# Altium PCB Tigershark 3D R1.7.PcbDoc (part 2 of 4)
Units mil, origin at the board's own origin, x right, y up, seen from the top; angles counter-clockwise.
Board outline 5500 x 4600 mil, 4 copper layers (Top Layer, Groun Plane, Power Plane, Bottom Layer); 303 components, 232 nets, 993 pads, 850 vias.
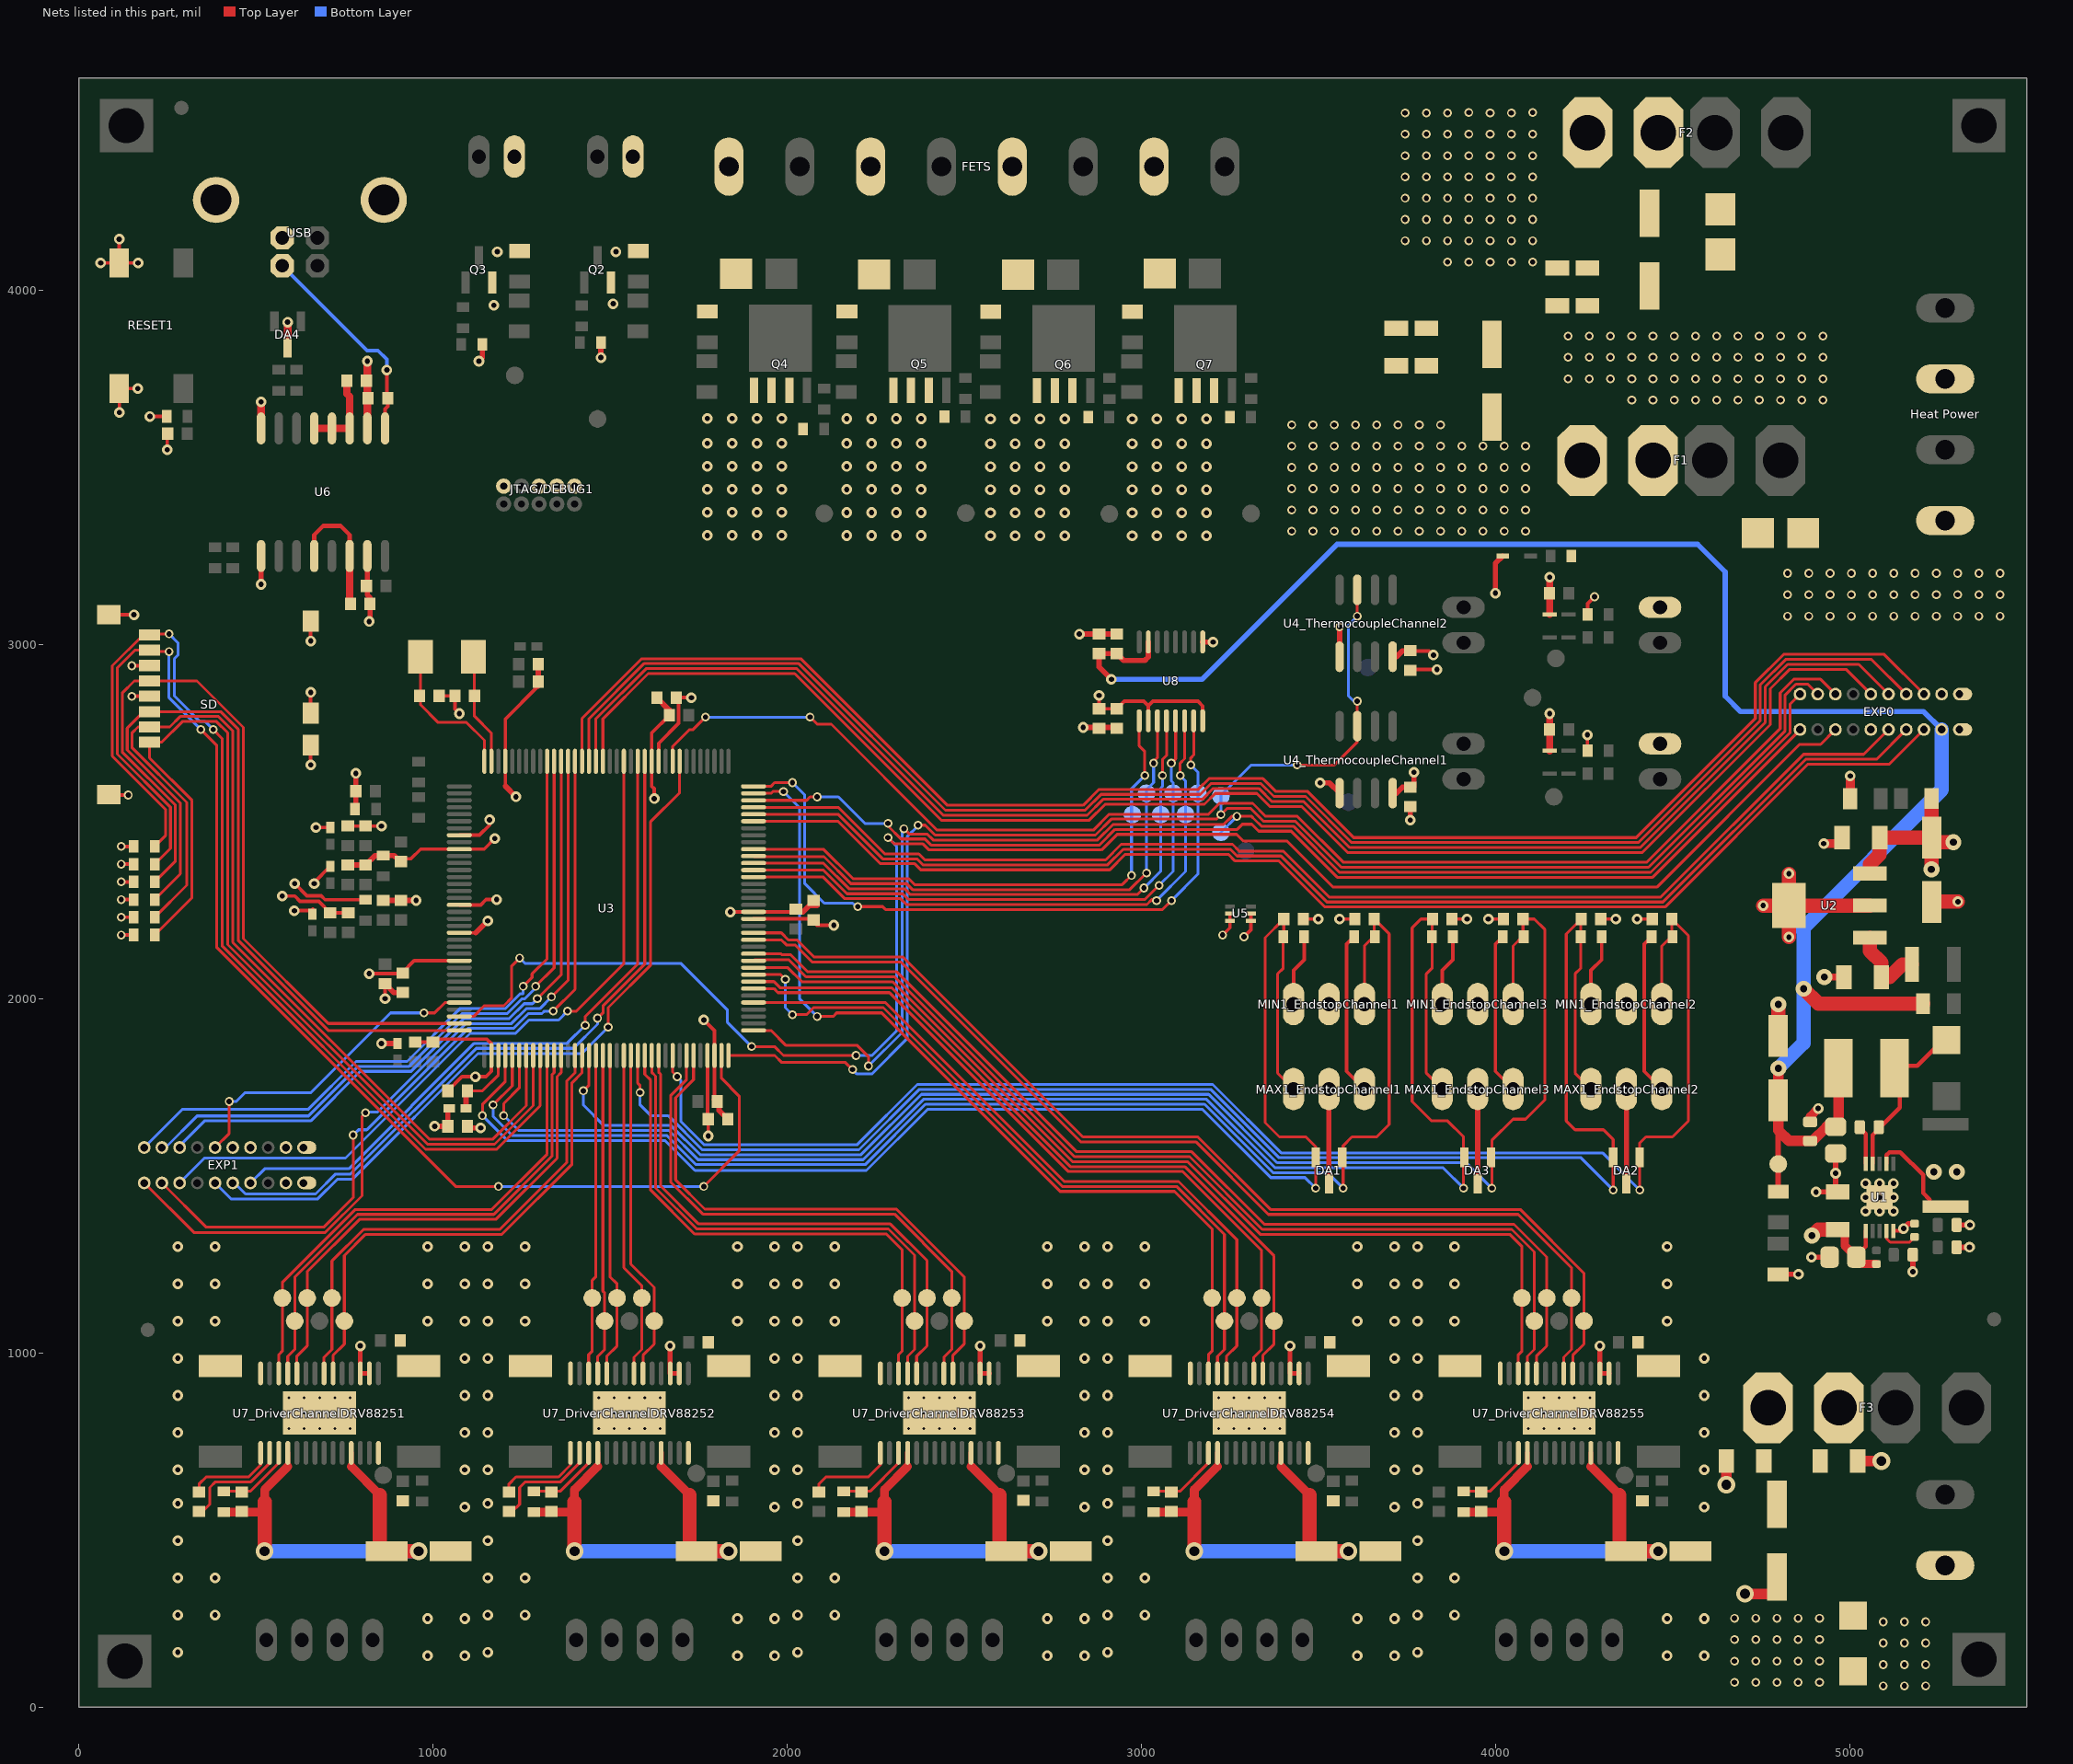
[diagram p4: the nets of this part, all layers, seen from the top]

## Via types
v1: diameter 30, hole 15, Top Layer to Bottom Layer, tented both sides, 375 vias
v2: diameter 25, hole 15, Top Layer to Bottom Layer, tented both sides, 369 vias
v3: diameter 19.68, hole 7.87, Top Layer to Bottom Layer, tented both sides, 75 vias
v4: diameter 50, hole 28, Top Layer to Bottom Layer, tented both sides, 13 vias
v5: diameter 45, hole 20, Top Layer to Bottom Layer, tented both sides, 9 vias
v6: diameter 30, hole 15, Top Layer to Bottom Layer, 9 vias

## Nets (pads, with @x,y where several pads share a name; then routed paths per layer and width w, separated by ;. In a path a pad name is that pad's centre, name@x,y a point inside that pad or via, vN(x,y) a via of type N, cw(c..) or ccw(c..) an arc to the next point about the centre after c; other vN are vias at no path point)
3.3VCC: C7.2 C25.2 C26.1 C29.1 C31_ThermocoupleChannel1.2 C31_ThermocoupleChannel2.2 C45.2 C46.2 C47.2 C48.2 C64.2 EXP0.12 EXP1.9 EXP1.12 FB5.1 FB6.1 FB7.1 FB8.1 FB9.1 JTAG/DEBUG1.1@1400,3447 MAX1_EndstopChannel1.3 MAX1_EndstopChannel2.3 MAX1_EndstopChannel3.3 MIN1_EndstopChannel1.3 MIN1_EndstopChannel2.3 MIN1_EndstopChannel3.3 R2_EndstopChannel1.1 R2_EndstopChannel2.1 R2_EndstopChannel3.1 R3_EndstopChannel1.1 R3_EndstopChannel2.1 R3_EndstopChannel3.1 R6.1 R11.2 R19_ThermistorChannel1.2 R19_ThermistorChannel2.2 R21.2 R24.2 R26.2 R27.2 R28.2 R29.2 R34.2 SD.4 U2.3 U3.11 U3.62 U3.105 U3.125 U4_ThermocoupleChannel1.4 U4_ThermocoupleChannel2.4 U5.1 U5.2 U5.5 U5.6 U7_DriverChannelDRV88251.16 U7_DriverChannelDRV88251.17 U7_DriverChannelDRV88252.16 U7_DriverChannelDRV88252.17 U7_DriverChannelDRV88253.16 U7_DriverChannelDRV88253.17 U7_DriverChannelDRV88254.16 U7_DriverChannelDRV88254.17 U7_DriverChannelDRV88255.16 U7_DriverChannelDRV88255.17 U8.2 U8.8 | length 5691.2
  Top Layer w10: v2(120,2180) R34.2@155.47,2180 ; v2(120,2230) R29.2@155.47,2230 ; v2(120,2280) R28.2@155.47,2280 ; v2(120,2330) R27.2@155.47,2330 ; v2(120,2380) R26.2@155.47,2380 ; v2(120,2430) R24.2@155.47,2430 ; v2(150,2853.94) SD.4@200,2853.94 ; v1(201,3644) R21.2@248.47,3644 ; v1(609,2248.62) 661.22,2248.62 FB5.1@661.22,2252.8 ; v1(610,2325) 644,2291 684.19,2291 695.66,2279.53 R6.1@810,2279.53 ; v1(665,2325) 665,2328.62 FB7.1@710,2373.62 ; v1(670,2483.62) FB8.1@710,2483.62 ; v1(820,2070.81) 895,2070.81 ; C48.2@915,2072.56 915,2075 947.36,2107.36 U3.62@1074.65,2107.36 ; U3.11@1637.64,2670.35 1637.64,2721.18 1694.19,2777.73 1694.19,2843.37 C47.2@1687.56,2850 v1(1730,2850) ; C45.2@1775.43,1660 U3.105@1775.43,1839.65 ; v1(1777.44,1612.56) C45.2@1777.44,1660 ; U3.125@1905.35,2225.47 2071.97,2225.47 C46.2@2075,2222.44 ; C46.2@2083.25,2209.19 2085,2207.44 v1(2132.44,2207.44) ; v1(2881,2856) C25.2@2881,2818.56 C26.1@2931,2818.56 2952.44,2840 3007,2840 3020.02,2826.98 ; U8.2@3020.02,2784.78 3020.02,2826.98 ; U8.8@3173.57,2784.78 3173.57,2826.43 3160,2840 3033.05,2840 3020.02,2826.98 ; v2(3230,2180) 3250.47,2200.47 U5.6@3250.47,2220.32 U5.5@3250.47,2240 ; v2(3290,2175) 3309.53,2194.53 U5.1@3309.53,2220.32 U5.2@3309.53,2240 ; MIN1_EndstopChannel1.3@3430,1985 3430,2080 3460,2110 R3_EndstopChannel1.1@3460,2175 ; R2_EndstopChannel1.1@3600.95,2175 3580,2154.06 3580,1795 MAX1_EndstopChannel1.3@3630,1745 ; C31_ThermocoupleChannel2.2@3775,2982.05 3812.95,2982.05 v1(3825,2970) ; MIN1_EndstopChannel3.3@3850,1985 3850,2080 3880,2110 R3_EndstopChannel3.1@3880,2175 ; R2_EndstopChannel3.1@4020.95,2175 4000,2154.06 4000,1795 MAX1_EndstopChannel3.3@4050,1745 ; v1(4260,2745) 4260,2700.47 R19_ThermistorChannel1.2@4260.47,2700 ; R19_ThermistorChannel2.2@4260.47,3085 4260.47,3115.47 v2(4280,3135) ; MIN1_EndstopChannel2.3@4270,1985 4270,2080 4300,2110 R3_EndstopChannel2.1@4300,2175 ; R2_EndstopChannel2.1@4440.95,2175 4420,2154.06 4420,1795 MAX1_EndstopChannel2.3@4470,1745
  Top Layer w14: U7_DriverChannelDRV88251.17@795,942.36 v1(795,1020) ; U7_DriverChannelDRV88251.17@795.16,942.2 U7_DriverChannelDRV88251.16@820.75,942.2 ; U7_DriverChannelDRV88252.17@1670,942.36 v1(1670,1020) ; U7_DriverChannelDRV88252.17@1670.16,942.2 U7_DriverChannelDRV88252.16@1695.75,942.2 ; U7_DriverChannelDRV88253.17@2545,942.36 v1(2545,1020) ; U7_DriverChannelDRV88253.17@2545.16,942.2 U7_DriverChannelDRV88253.16@2570.75,942.2 ; U7_DriverChannelDRV88254.17@3420,942.36 v1(3420,1020) ; U7_DriverChannelDRV88254.17@3420.16,942.2 U7_DriverChannelDRV88254.16@3445.75,942.2 ; U7_DriverChannelDRV88255.17@4295,942.36 v1(4295,1020) ; U7_DriverChannelDRV88255.17@4295.16,942.2 U7_DriverChannelDRV88255.16@4320.75,942.2
  Top Layer w15: v1(855,1873.62) FB6.1@900,1873.62 ; v1(1005,1640) C64.2@1042.44,1640 FB9.1@1042.44,1686.06 ; U4_ThermocoupleChannel1.4@3710,2580.51 3721.02,2580.51 3737.56,2597.05 3770,2597.05 v1(3770,2639.49) ; U4_ThermocoupleChannel2.4@3710,2965.51 3721.02,2965.51 3737.56,2982.05 C31_ThermocoupleChannel2.2@3770,2982.05
  Top Layer w40: U2.3@5057.17,2353.55 5057.17,2379.17 5085.15,2407.15 C7.2@5085.15,2455 5231.55,2455 5231.55,2564.76 R11.2@5231.31,2565 ; v5(5231,2365) C29.1@5231,2453.55 ; C29.1@5244.55,2442 v5(5293,2442)
+5VCC: C11.1 C17.1 C20.1 C21.1 C24.1 EXP0.9 L1.2 R7.2 R8.2 R10.1 R25.1 TP1.TP U8.15 | length 5490.3
  Top Layer w15: v1(2916,2902) 2881,2937 C20.1@2881,2974.44 C17.1@2931,2974.44 2950.44,2955 3010,2955 3020.02,2965.02 U8.15@3020.02,3007.22 ; R8.2@4798.57,1455.62 TP1.TP@4798.57,1533.31 4798.57,1628.31 ; R7.2@5178.35,1277.32 5178.57,1277.09 v1(5178.57,1229.31) ; R10.1@5302.34,1361.31 v1(5339.57,1361.31)
  Top Layer w30: v5(4798.57,1803.31) C24.1@4798.57,1713.76 4798.57,1628.31 4828.35,1598.54 C11.1@4888.57,1598.54 4895.57,1598.54 4935.74,1638.72 C21.1@4960.57,1638.72 ; C21.1@4968.83,1646.98 L1.2@4968.83,1804.31
  Top Layer w40: v5(4870,2028) 4912,1986 R25.1@5207.69,1986
  Bottom Layer w15: v1(2916,2902) 3172,2902 3553,3283 4571,3283 4649,3205 4649,2854 4692,2811 5209,2811 EXP0.9@5260,2760
  Bottom Layer w40: v5(4798.57,1803.31) 4870,1874.74 4870,2190.98 4868,2192.98 4868,2198 5260,2590 EXP0.9@5260,2760
+12VCC1: C9.1 C10.1 C16.1 C18.2 C19.2 C66_DriverChannelDRV88251.1 C66_DriverChannelDRV88252.1 C66_DriverChannelDRV88253.1 C66_DriverChannelDRV88254.1 C66_DriverChannelDRV88255.1 C69_DriverChannelDRV88251.1 C69_DriverChannelDRV88252.1 C69_DriverChannelDRV88253.1 C69_DriverChannelDRV88254.1 C69_DriverChannelDRV88255.1 D8.C F3.2 R17.2 R30_DriverChannelDRV88251.1 R30_DriverChannelDRV88252.1 R30_DriverChannelDRV88253.1 R30_DriverChannelDRV88254.1 R30_DriverChannelDRV88255.1 U1.1 U7_DriverChannelDRV88251.4 U7_DriverChannelDRV88251.11 U7_DriverChannelDRV88252.4 U7_DriverChannelDRV88252.11 U7_DriverChannelDRV88253.4 U7_DriverChannelDRV88253.11 U7_DriverChannelDRV88254.4 U7_DriverChannelDRV88254.11 U7_DriverChannelDRV88255.4 U7_DriverChannelDRV88255.11 | length 6500.5
  Top Layer w12: C10.1@5036.05,1291.68 5045.2,1300.83 U1.1@5045.2,1344.83
  Top Layer w14: 590.43,679.43 U7_DriverChannelDRV88251.4@590.43,717.8 ; 769.57,679.43 U7_DriverChannelDRV88251.11@769.57,717.8 ; 1465.43,679.43 U7_DriverChannelDRV88252.4@1465.43,717.8 ; 1644.57,679.43 U7_DriverChannelDRV88252.11@1644.57,717.8 ; 2340.43,679.43 U7_DriverChannelDRV88253.4@2340.43,717.8 ; 2519.57,679.43 U7_DriverChannelDRV88253.11@2519.57,717.8 ; 3215.43,679.43 U7_DriverChannelDRV88254.4@3215.43,717.8 ; 3394.57,679.43 U7_DriverChannelDRV88254.11@3394.57,717.8 ; 4090.43,679.43 U7_DriverChannelDRV88255.4@4090.43,717.8 ; 4269.57,679.43 U7_DriverChannelDRV88255.11@4269.57,717.8
  Top Layer w24: C9.1@4986.57,1328.15 4986.57,1302.72 C10.1@5018.98,1270.31 ; C10.1@5037.98,1251.31 R17.2@5075.57,1251.31
  Top Layer w25: R30_DriverChannelDRV88251.1@410,550.47 525,550.47 ; 525,580 525,614 590.43,679.43 ; 769.57,679.43 850,599 ; R30_DriverChannelDRV88252.1@1285,550.47 1400,550.47 ; 1400,580 1400,614 1465.43,679.43 ; 1644.57,679.43 1725,599 ; R30_DriverChannelDRV88253.1@2160,550.47 2275,550.47 ; 2275,580 2275,614 2340.43,679.43 ; 2519.57,679.43 2600,599 ; R30_DriverChannelDRV88254.1@3035,550.47 3150,550.47 ; 3150,580 3150,614 3215.43,679.43 ; 3394.57,679.43 3475,599 ; R30_DriverChannelDRV88255.1@3910,550.47 4025,550.47 ; 4025,580 4025,614 4090.43,679.43 ; 4269.57,679.43 4350,599
  Top Layer w40: v4(525,440) 525,580 ; C69_DriverChannelDRV88251.1@850,440.55 850,599 ; C69_DriverChannelDRV88251.1@869.45,440 v4(960,440) ; v4(1400,440) 1400,580 ; C69_DriverChannelDRV88252.1@1725,440.55 1725,599 ; C69_DriverChannelDRV88252.1@1744.45,440 v4(1835,440) ; v4(2275,440) 2275,580 ; C69_DriverChannelDRV88253.1@2600,440.55 2600,599 ; C69_DriverChannelDRV88253.1@2619.45,440 v4(2710,440) ; v4(3150,440) 3150,580 ; C69_DriverChannelDRV88254.1@3475,440.55 3475,599 ; C69_DriverChannelDRV88254.1@3494.45,440 v4(3585,440) ; v4(4025,440) 4025,580 ; C69_DriverChannelDRV88255.1@4350,440.55 4350,599 ; C69_DriverChannelDRV88255.1@4369.45,440 v4(4460,440) ; v5(4894,1331) 4911.17,1348.17 C9.1@4966.57,1348.17
  Bottom Layer w40: v4@530,440 v4(960,440) ; v4@1405,440 v4(1835,440) ; v4@2280,440 v4(2710,440) ; v4@3155,440 v4(3585,440) ; v4@4030,440 v4(4460,440)
  other v2: 4675,70 4735,70 4795,70 4855,70 4915,70 4675,130 4735,130 4795,130 4855,130 4915,130 4675,191 4735,191 4795,191 4855,191 4915,191 4675,251 4735,251 4795,251 4855,251 4915,251
+12VCC2: C12.1 C14.2 C15.2 D6.2 D12.2 D15.2 D17.2 F1.2 FAN-1.1 FAN-2.1 FETS.1 FETS.3 FETS.5 R1.2 R13.1 R47.1 R56.2 R60.2 R64.2
  other v2: 3425,3320 3485,3320 3545,3320 3605,3320 3665,3320 3725,3320 3785,3320 3845,3320 3905,3320 3965,3320 4025,3320 4085,3320 3425,3380 3485,3380 3545,3380 3605,3380 3665,3380 3725,3380 3785,3380 3845,3380 3905,3380 3965,3380 4025,3380 4085,3380 3425,3440 3485,3440 3545,3440 3605,3440 3665,3440 3725,3440 3785,3440 3845,3440 3905,3440 3965,3440 4025,3440 4085,3440 3425,3500 3485,3500 3545,3500 3605,3500 3665,3500 3725,3500 3785,3500 3845,3500 3905,3500 3965,3500 4025,3500 4085,3500 3425,3560 3485,3560 3545,3560 3605,3560 3665,3560 3725,3560 3785,3560 3845,3560 3905,3560 3965,3560 4025,3560 4085,3560 3425,3620 3485,3620 3545,3620 3605,3620 3665,3620 3725,3620 3785,3620 3845,3620
+12VCC3: C3.1 C5.2 C6.2 D4.2 D19.2 F2.2 FETS.7 R68.2
  other v2: 3865,4080 3925,4080 3985,4080 4045,4080 4105,4080 3745,4140 3805,4140 3865,4140 3925,4140 3985,4140 4045,4140 4105,4140 3745,4200 3805,4200 3865,4200 3925,4200 3985,4200 4045,4200 4105,4200 3745,4260 3805,4260 3865,4260 3925,4260 3985,4260 4045,4260 4105,4260 3745,4320 3805,4320 3865,4320 3925,4320 3985,4320 4045,4320 4105,4320 3745,4380 3805,4380 3865,4380 3925,4380 3985,4380 4045,4380 4105,4380 3745,4441 3805,4441 3865,4441 3925,4441 3985,4441 4045,4441 4105,4441 3745,4501 3805,4501 3865,4501 3985,4501 4045,4501 3925,4502 4105,4502
AVREF: C65.2 FB9.2 U3.75 | length 206.7
  Top Layer w8: C65.2@1097.56,1740 1140,1740 1184.88,1784.88 U3.75@1184.88,1839.65
  Top Layer w15: FB9.2@1093.62,1690 C65.2@1093.62,1736.06
BED_PWM: TP38.1 U3.144 U8.7 | length 2039.8
  Top Layer w8: U3.144@1905.35,2599.49 1954.49,2599.49 1965,2610 v2(2015,2610) ; v2(2200,2260) 2270,2260 2278,2252 3060.14,2252 v2@3087.78,2279.64 ; v2(3140,2660) 3140,2680 3148.39,2688.39 U8.7@3148.39,2784.78
  Bottom Layer w8: v2(2015,2610) 2050,2575 2050,2325 2105,2270 2185,2270 2195,2260 v2(2200,2260) ; v2@3087.78,2279.64 3160,2351.86 3160,2640 v2(3140,2660)
  other v2: 3085.71,2277.22
DIR1: TP39_DriverChannelDRV88251.1 U3.87 U7_DriverChannelDRV88251.20 | length 1414
  Top Layer w8: U7_DriverChannelDRV88251.20@718.39,942.2 718.39,993.39 750,1025 TP39_DriverChannelDRV88251.1@750,1090 750,1274.8 810.2,1335 1195.2,1335 1392.68,1532.48 1392.68,1762.68 1421.1,1791.1 U3.87@1421.1,1839.65
DIR2: TP39_DriverChannelDRV88252.1 U3.94 U7_DriverChannelDRV88252.20 | length 937.9
  Top Layer w8: U3.94@1558.9,1839.65 1558.9,1251.1 1625,1185 TP39_DriverChannelDRV88252.1@1625,1090 1625,1025 1593.39,993.39 U7_DriverChannelDRV88252.20@1593.39,942.2
DIR3: TP39_DriverChannelDRV88253.1 U3.103 U7_DriverChannelDRV88253.20 | length 1586
  Top Layer w8: U3.103@1736.06,1839.65 1736.06,1771.26 1685.32,1720.52 1685.32,1488.67 1767.99,1406 2309.2,1406 2500,1215.2 TP39_DriverChannelDRV88253.1@2500,1090 2500,1025 2468.39,993.39 U7_DriverChannelDRV88253.20@2468.39,942.2
DIR4: TP39_DriverChannelDRV88254.1 U3.116 U7_DriverChannelDRV88254.20 | length 2135.3
  Top Layer w8: U3.116@1905.35,2048.31 1963.1,2048.31 1980.16,2031.25 2294.95,2031.25 2800.21,1526 3122.99,1526 3375,1273.99 TP39_DriverChannelDRV88254.1@3375,1090 3375,1025 3343.39,993.39 U7_DriverChannelDRV88254.20@3343.39,942.2
DIR5: TP39_DriverChannelDRV88255.1 U3.123 U7_DriverChannelDRV88255.20 | length 3038.8
  Top Layer w8: U3.123@1905.35,2186.1 1983.7,2186.1 2003.8,2166 2028.2,2166 2076.31,2117.88 2327.12,2117.88 2835,1610 3160,1610 3365,1405 4070.2,1405 4250,1225.2 TP39_DriverChannelDRV88255.1@4250,1090 4250,1025 4218.39,993.39 U7_DriverChannelDRV88255.20@4218.39,942.2
DIR_EXP1: EXP1.6 U3.13 | length 2026.6
  Top Layer w8: v2(1465,1945) 1481,1961 1481,1980.8 1598.27,2098.07 U3.13@1598.27,2670.35
  Bottom Layer w8: EXP1.6@445,1475 471,1449 669,1449 725,1505 767.6,1505 1122.6,1860 1396.82,1860 1465,1928.18 v2(1465,1945)
DIR_EXP2: EXP1.15
DRV_RESET_EXP1: EXP1.7 U3.14 | length 1936.2
  Top Layer w8: v2(1430,1925) 1430,1949.6 1578.58,2098.18 U3.14@1578.58,2670.35
  Bottom Layer w8: EXP1.7@485,1480 525,1520 762.8,1520 1116.8,1874 1379,1874 v2(1430,1925)
DRV_RESET_EXP2: EXP1.14
EN1: TP32_DriverChannelDRV88251.1 U3.86 U7_DriverChannelDRV88251.21 | length 1416.5
  Top Layer w8: U7_DriverChannelDRV88251.21@692.8,942.2 692.8,987.8 715,1010 TP32_DriverChannelDRV88251.1@715,1155 715,1259.6 804.4,1349 1189.4,1349 1378.68,1538.28 1378.68,1768.48 1401.42,1791.22 U3.86@1401.42,1839.65
EN2: TP32_DriverChannelDRV88252.1 U3.93 U7_DriverChannelDRV88252.21 | length 927.7
  Top Layer w8: U3.93@1539.21,1839.65 1539.21,1240.79 1590,1190 TP32_DriverChannelDRV88252.1@1590,1155 1590,1010 1567.8,987.8 U7_DriverChannelDRV88252.21@1567.8,942.2
EN3: TP32_DriverChannelDRV88253.1 U3.102 U7_DriverChannelDRV88253.21 | length 1571.1
  Top Layer w8: U3.102@1716.38,1839.65 1716.38,1771.38 1671.32,1726.32 1671.32,1482.87 1762.2,1392 2303.4,1392 2465,1230.4 TP32_DriverChannelDRV88253.1@2465,1155 2465,1010 2442.8,987.8 U7_DriverChannelDRV88253.21@2442.8,942.2
EN4: TP32_DriverChannelDRV88254.1 U3.115 U7_DriverChannelDRV88254.21 | length 2097.1
  Top Layer w8: U3.115@1905.35,2028.62 1962.99,2028.62 1974.36,2017.25 2289.16,2017.25 2794.41,1512 3117.2,1512 3340,1289.2 TP32_DriverChannelDRV88254.1@3340,1155 3340,1010 3317.8,987.8 U7_DriverChannelDRV88254.21@3317.8,942.2
EN5: TP32_DriverChannelDRV88255.1 U3.122 U7_DriverChannelDRV88255.21 | length 3000.6
  Top Layer w8: U3.122@1905.35,2166.42 1983.58,2166.42 1998,2152 2022.4,2152 2070.51,2103.88 2321.32,2103.88 2829.2,1596 3154.2,1596 3359.2,1391 4064.4,1391 4215,1240.4 TP32_DriverChannelDRV88255.1@4215,1155 4215,1010 4192.8,987.8 U7_DriverChannelDRV88255.21@4192.8,942.2
EN_EXP1: EXP1.5 U3.8 | length 2163.4
  Top Layer w8: v2(1495,1920) 1495,1975 1615,2095 1615,2500 1696.69,2581.69 U3.8@1696.69,2670.35
  Bottom Layer w8: EXP1.5@385,1480 430,1435 675,1435 730,1490 772.4,1490 1127.4,1845 1420,1845 v2(1495,1920)
EN_EXP2: EXP1.16 U3.68 | length 911.9
  Top Layer w8: EXP1.16@385,1580 425,1620 v2(425,1710) ; v2(975,1960) 1005,1960 1034.25,1989.25 U3.68@1074.65,1989.25
  Bottom Layer w8: v2(425,1710) 445,1710 470,1735 655.8,1735 880.8,1960 v2(975,1960)
EXP_CS: EXP0.1 U3.142 | length 3278.5
  Top Layer w8: U3.142@1905.35,2560.12 2055.12,2560.12 2065,2570 v2(2085,2570) ; v2(2285,2495) 2285,2488.18 2322.18,2451 2389.6,2451 2406.6,2434 2882.19,2434 2926.12,2477.93 3271.11,2477.93 3285.68,2492.5 3312.3,2492.5 3331.8,2473 3423.61,2473 3553.61,2343 4444.01,2343 4860,2758.99 EXP0.1@4860,2760
  Bottom Layer w8: v2(2085,2570) 2145,2570 2220,2495 v2(2285,2495)
EXP_INTERRUP1: EXP0.16 U3.19 | length 4326.6
  Top Layer w8: U3.19@1480.16,2670.35 1480.16,2790.16 1608,2918 2021.6,2918 2435.6,2504 2853.2,2504 2898.2,2549 3178.4,2549 3208.9,2579.5 3326.31,2579.5 3362.81,2543 3452.6,2543 3582.6,2413 4415.01,2413 4776,2773.99 4776,2874.99 4831.01,2930 4990,2930 EXP0.16@5060,2860
EXP_INTERRUP2: EXP0.15 U3.20 | length 4408.1
  Top Layer w8: U3.20@1460.47,2670.35 1460.47,2790.47 1602,2932 2027.4,2932 2441.4,2518 2847.4,2518 2892.4,2563 3172.6,2563 3203.1,2593.5 3332.11,2593.5 3368.61,2557 3458.4,2557 3588.4,2427 4409.21,2427 4762,2779.79 4762,2880.79 4825.21,2944 5026,2944 EXP0.15@5110,2860
EXP_SYNC: EXP0.6 U3.141 | length 3541.9
  Top Layer w8: U3.141@1905.35,2540.43 2144.57,2540.43 2276,2409 2372.21,2409 2389.21,2392 2899.59,2392 2943.51,2435.93 3257.66,2435.93 3276.58,2417 3400.41,2417 3530.41,2287 4467.2,2287 4870.2,2690 5040,2690 EXP0.6@5110,2760
FET_PWM1: TP43.1 U3.135 U8.1 | length 1581.4
  Top Layer w8: U3.135@1905.35,2422.32 2102.68,2422.32 2186,2339 2343.21,2339 2360.21,2322 2946.29,2322 v2@2974.64,2350.36 ; U8.1@2994.43,2784.78 2994.43,2713.57 3010,2698 v2(3010,2630)
  Bottom Layer w8: v2(2972.57,2347.93) 2972.57,2592.57 v2(3010,2630)
FET_PWM2: TP44.1 U3.134 U8.3 | length 1610.8
  Top Layer w8: U3.134@1905.35,2402.64 1906.99,2401 2104.2,2401 2180.2,2325 2337.41,2325 2354.41,2308 2967.64,2308 v2@3014.82,2355.18 ; v2(3035,2665) 3035,2669.8 3046.02,2680.82 U8.3@3046.02,2784.78
  Bottom Layer w8: v2(3015,2355) TP44.1@3015,2580 3015,2590 3035,2610 v2(3035,2665)
FET_PWM3: TP45.1 U3.133 U8.4 | length 1645.5
  Top Layer w8: U3.133@1905.35,2382.95 2102.45,2382.95 2174.9,2310.5 2332.11,2310.5 2348.61,2294 2989,2294 v2@3010,2315 ; v2(3060,2630) 3060,2675 3071.61,2686.61 U8.4@3071.61,2784.78
  Bottom Layer w8: v2@3010,2315 3055,2360 3055,2594.5 3060,2599.5 v2(3060,2630)
  other v2: 3007.93,2312.57
FET_PWM4: TP46.1 U3.132 U8.5 | length 1684.4
  Top Layer w8: U3.132@1905.35,2363.27 2033.27,2363.27 2033.31,2363.31 2102.3,2363.31 2169.1,2296.5 2326.32,2296.5 2342.82,2280 3010.2,2280 3052.27,2322.07 v2@3052.43,2322.07 ; v2(3085,2665) 3097.2,2677.2 U8.5@3097.2,2784.78
  Bottom Layer w8: v2@3052.43,2322.07 3090,2359.64 3090,2610 3085,2615 v2(3085,2665)
  other v2: 3050.36,2319.64
FET_PWM5: TP47.1 U3.131 U8.6 | length 1727.4
  Top Layer w8: U3.131@1905.35,2343.58 2102.22,2343.58 2163.3,2282.5 2320.52,2282.5 2337.02,2266 3016,2266 3029.64,2279.64 v2@3045.36,2279.64 ; v2(3110,2630) 3110,2665 3122.8,2677.8 U8.6@3122.8,2784.78
  Bottom Layer w8: v2@3045.36,2279.64 3125,2359.29 3125,2615 v2(3110,2630)
  other v2: 3043.28,2277.22
GND: "Heat Power.2" "Heat Power.4" "Motor Power.2" C1_EndstopChannel1.2 C1_EndstopChannel2.2 C1_EndstopChannel3.2 C2_EndstopChannel1.2 C2_EndstopChannel2.2 C2_EndstopChannel3.2 C3.2 C4.1 C5.1 C6.1 C7.1 C9.2 C10.2 C11.2 C12.2 C13.1 C14.1 C15.1 C16.2 C17.2 C18.1 C19.1 C20.2 C21.2 C22.2 C23.1 C24.2 C25.1 C26.2 C27.1 C28.1 C29.2 C30_ThermistorChannel1.1 C30_ThermistorChannel2.1 C31_ThermocoupleChannel1.1 C31_ThermocoupleChannel2.1 C32.1 C33.1 C36.1 C37.1 C38.1 C39.1 C41.1 C42.1 C43.1 C44.1 C45.1 C46.1 C47.1 C48.1 C53.1 C54.1 C55.1 C56.1 C57.1 C60.1 C61.1 C63.1 C64.1 C65.1 C69_DriverChannelDRV88251.2 C69_DriverChannelDRV88252.2 C69_DriverChannelDRV88253.2 C69_DriverChannelDRV88254.2 C69_DriverChannelDRV88255.2 C71_DriverChannelDRV88251.1 C71_DriverChannelDRV88252.1 C71_DriverChannelDRV88253.1 C71_DriverChannelDRV88254.1 C71_DriverChannelDRV88255.1 C73.1 C75_DriverChannelDRV88251.1 C75_DriverChannelDRV88252.1 C75_DriverChannelDRV88253.1 C75_DriverChannelDRV88254.1 C75_DriverChannelDRV88255.1 D1.1 D4.1 D5_ThermistorChannel1.1 D5_ThermistorChannel2.1 D6.1 D7.1 D8.A D9.1 DA1.3 DA2.3 DA3.3 EXP0.10 EXP0.11 EXP1.10 EXP1.11 JTAG/DEBUG1.3 JTAG/DEBUG1.5 JTAG/DEBUG1.9 MAX1_EndstopChannel1.2 MAX1_EndstopChannel2.2 MAX1_EndstopChannel3.2 MIN1_EndstopChannel1.2 MIN1_EndstopChannel2.2 MIN1_EndstopChannel3.2 P2_ThermistorChannel1.2 P2_ThermistorChannel2.2 Q2.2 Q3.2 Q4.1 Q4.2 Q4.3 Q5.1 Q5.2 Q5.3 Q6.1 Q6.2 Q6.3 Q7.1 Q7.2 Q7.3 R4.2 R9.1 R12.2 R23.1 R32_DriverChannelDRV88251.1 R32_DriverChannelDRV88252.1 R32_DriverChannelDRV88253.1 R32_DriverChannelDRV88254.1 R32_DriverChannelDRV88255.1 R33_DriverChannelDRV88251.1 R33_DriverChannelDRV88252.1 R33_DriverChannelDRV88253.1 R33_DriverChannelDRV88254.1 R33_DriverChannelDRV88255.1 R46.2 R55.2 R59.2 R63.2 R67.2 R71.2 RESET1.2 SD.6 SD.9 SD.10 SD.11 SD.12 SD.13 U1.5 U1.7 U1.11 U2.2 U2.4 U3.12 U3.33 U3.44 U3.46 U3.54 U3.58 U3.74 U3.106 U3.126 U4_ThermocoupleChannel1.1 U4_ThermocoupleChannel2.1 U6.9 U6.15 U7_DriverChannelDRV88251.14 U7_DriverChannelDRV88251.28 U7_DriverChannelDRV88251.29 U7_DriverChannelDRV88252.14 U7_DriverChannelDRV88252.28 U7_DriverChannelDRV88252.29 U7_DriverChannelDRV88253.14 U7_DriverChannelDRV88253.28 U7_DriverChannelDRV88253.29 U7_DriverChannelDRV88254.14 U7_DriverChannelDRV88254.28 U7_DriverChannelDRV88254.29 U7_DriverChannelDRV88255.14 U7_DriverChannelDRV88255.28 U7_DriverChannelDRV88255.29 U8.9 | length 7891.9
  Top Layer w10: v1(62.17,4077.17) RESET1.2@114.45,4077.17 ; SD.10@85,3084 v1(156,3084) ; SD.9@86,2575 v2(140,2575) ; v1(114.45,4144.45) RESET1.2@114.45,4077.17 ; v1(115,3655) 115,3722.28 RESET1.2@114.45,3722.83 v1(167.17,3722.83) ; v2(150,2940) 199.45,2940 SD.6@200,2940.55 ; v1(167.83,4077.17) RESET1.2@114.45,4077.17 ; v1(250,3550) 250,3593.56 C63.1@251.44,3595 ; v1(575,2290) 610,2290 625,2275 677.56,2275 C55.1@710,2242.56 C54.1@761.22,2242.56 ; v1(655,2660) SD.11@655,2716 ; SD.12@655,2806 v1(655,2865) ; v1(655,3010) SD.13@655,3066 ; C61.1@760,2487.56 C60.1@810,2487.56 v1(855,2487.56) ; v1(865,2000) C42.1@865,2042.44 ; C41.1@900,2395 938.23,2395 965.55,2422.32 U3.46@1074.65,2422.32 1144.84,2422.32 v1(1175,2452.48) ; C27.1@950,1877.56 C13.1@1000,1877.56 1008.52,1886.08 1152.51,1886.08 1165.2,1873.4 U3.74@1165.2,1839.65 1165.2,1795.2 1150,1780 v1(1120,1780) 1082.44,1780 C65.1@1042.44,1740 ; C43.1@1017.56,2855 C44.1@1062.44,2855 1062.44,2817.56 v1(1075,2805) ; U3.58@1074.65,2186.1 1121.1,2186.1 ; U3.54@1074.65,2264.84 1134.84,2264.84 1150,2280 v1(1180,2280) ; U3.44@1074.65,2461.69 1131.69,2461.69 1160,2490 v1(1160,2505) ; 1204.57,2600.16 U3.33@1204.57,2670.35 1204.57,2789.18 1295.39,2880 1297.19,2880 1297.56,2880.37 C33.1@1297.56,2895 ; v1(1625,2565) 1625,2593.11 1617.95,2600.16 U3.12@1617.95,2670.35 1617.95,2750.51 C38.1@1667.44,2800 ; v1(1764.96,1940) 1795.12,1909.84 U3.106@1795.12,1839.65 C23.1@1795.12,1715.13 ; v1@1835.16,2245.16 U3.126@1905.35,2245.16 2045.16,2245.16 ; C2_EndstopChannel1.2@3457.56,2225 v1(3500,2225) ; v1(3560,2225) C1_EndstopChannel1.2@3602.91,2225 ; C31_ThermocoupleChannel2.1@3777.56,2929.49 v1(3835,2929.49) ; C2_EndstopChannel3.2@3877.56,2225 v1(3920,2225) ; v1(3980,2225) C1_EndstopChannel3.2@4022.91,2225 ; C2_EndstopChannel2.2@4297.56,2225 v1(4340,2225) ; v1(4400,2225) C1_EndstopChannel2.2@4442.91,2225 ; U1.5@5123.94,1344.83 v1@5146.09,1344.83
  Top Layer w12: U1.7@5104.26,1533.8 5104.26,1558.49 5112.65,1566.88 5143.13,1566.88 5207.59,1502.42 5207.59,1451.36 5226,1432.95
  Top Layer w15: v1(515,3170) U6.9@515,3249.88 ; C28.1@760,2377.56 C53.1@810,2377.56 836.97,2404.53 R4.2@860,2404.53 890.47,2404.53 C41.1@900,2395 ; R23.1@782.44,2536.97 v1(782.44,2636.22) ; U6.15@815,3249.88 815,3140 822.56,3132.44 C56.1@822.56,3115 v1@822.56,3067.56 ; C37.1@860,2277.56 C36.1@910,2277.56 v1(952.44,2277.56) ; C42.1@865,2042.44 890,2017.44 C48.1@915,2017.44 ; C64.1@1097.56,1640 C64.1@1097.88,1639.68 ; C64.1@1102.56,1635 v1(1135,1635) ; 1121.1,2186.1 v1(1155,2220) ; v1(1130,3800) 1139.53,3809.53 R55.2@1139.53,3847.58 ; 1204.57,2600.16 v1(1234.72,2570) ; C33.1@1297.56,2895 C32.1@1297.56,2945 ; v1(1474.53,3810) R46.2@1474.53,3852.58 ; C47.1@1632.44,2850 1667.44,2815 C38.1@1667.44,2800 ; C23.1@1795.12,1715.13 1808.07,1702.18 1808.07,1684.92 C45.1@1832.99,1660 ; 2045.16,2245.16 2062.56,2262.56 C46.1@2085,2262.56 ; v1(2825.44,3029.56) C20.2@2881,3029.56 C17.2@2931,3029.56 ; v1(2836,2766) C26.2@2928.44,2766 ; U8.9@3173.57,3007.22 3202.78,3007.22 v1(3203,3007) ; v1(3505,2609.49) 3531.02,2609.49 U4_ThermocoupleChannel1.1@3560,2580.51 ; DA1.3@3530,1477.6 MAX1_EndstopChannel1.2@3530,1745 ; U4_ThermocoupleChannel2.1@3560,2965.51 v2(3560,3050) ; v1(3760,2504.49) C31_ThermocoupleChannel1.1@3760,2542.44 ; DA3.3@3950,1477.6 MAX1_EndstopChannel3.2@3950,1745 ; v1(4000,3145) 4000,3229.37 D1.1@4020.63,3250 ; DA2.3@4370,1477.6 MAX1_EndstopChannel2.2@4370,1745 ; D7.1@4798.46,1222.31 v1(4855.57,1222.31) ; v1(4892.57,1270.31) C10.2@4943.57,1270.31 ; v1(4905.57,1454.31) 4905.72,1454.46 C9.2@4966.57,1454.46 ; C9.2@4960.57,1460.46 v1(4960.57,1507.31) C21.2@4960.57,1563.31 ; v1@5146.09,1344.83 5166.57,1365.31 C22.2@5183.57,1365.31 ; R12.2@5302.35,1298.32 v1(5338.57,1298.31)
  Top Layer w20: D5_ThermistorChannel1.1@4153.43,2700 v1(4153.43,2805) ; D5_ThermistorChannel2.1@4153.43,3085 v1(4153.43,3190) ; v5(4929,2061) C4.1@4983.85,2061
  Top Layer w25: C11.2@4888.57,1652.09 4888.57,1667.31 v1(4911.57,1690.31) ; v1(4927,2438) C7.1@4961.85,2438 ; D9.1@5002,2564.88 v1(5002,2629)
  Top Layer w30: v4(4651.85,628.15) C18.1@4651.85,695 ; v4(4705,320) 4795,320 C16.2@4795,367.64 ; C19.1@5023.15,695 v4(5090,695)
  Top Layer w40: v1(4756,2263) U2.4@4828.83,2263 ; C24.2@4798.57,1894.87 4799,1895.29 v5(4799,1984) ; v1@4828.83,2174.17 U2.4@4828.83,2263 ; v1(4829,2353) U2.4@4829,2263 ; U2.2@5057.17,2263 U2.4@4829,2263 ; C29.2@5232.55,2274 v1(5306,2274) ; U2.4@4828.83,2263 U2.4@4829,2263
  other v1: 985,145 1090,145 1860,145 1965,145 2735,145 2840,145 3610,145 3715,145 4485,145 4590,145 280,155 1155,155 2030,155 2905,155 3780,155 985,250 1090,250 1860,250 1965,250 2735,250 2840,250 3610,250 3715,250 4485,250 4590,250 280,260 385,260 1155,260 1260,260 2030,260 2135,260 2905,260 3010,260 3780,260 3885,260 280,365 385,365 1155,365 1260,365 2030,365 2135,365 2905,365 3010,365 3780,365 3885,365 280,470 1155,470 2030,470 2905,470 3780,470 1090,565 1965,565 2840,565 3715,565 4590,565 280,575 1155,575 2030,575 2905,575 3780,575 280,670 1090,670 1155,670 1965,670 2030,670 2840,670 2905,670 3715,670 3780,670 4590,670 280,775 1090,775 1155,775 1965,775 2030,775 2840,775 2905,775 3715,775 3780,775 4590,775 280,880 1090,880 1155,880 1965,880 2030,880 2840,880 2905,880 3715,880 3780,880 4590,880 280,985 1090,985 1155,985 1965,985 2030,985 2840,985 2905,985 3715,985 3780,985 4590,985 280,1090 385,1090 985,1090 1090,1090 1155,1090 1260,1090 1860,1090 1965,1090 2030,1090 2135,1090 2735,1090 2840,1090 2905,1090 3010,1090 3610,1090 3715,1090 3780,1090 3885,1090 4485,1090 280,1195 385,1195 985,1195 1090,1195 1155,1195 1260,1195 1860,1195 1965,1195 2030,1195 2135,1195 2735,1195 2840,1195 2905,1195 3010,1195 3610,1195 3715,1195 3780,1195 3885,1195 4485,1195 280,1300 385,1300 985,1300 1090,1300 1155,1300 1260,1300 1860,1300 1965,1300 2030,1300 2135,1300 2735,1300 2840,1300 2905,1300 3010,1300 3610,1300 3715,1300 3780,1300 3885,1300 4485,1300 5152.57,1351.31 4829,2174 1840,2245 820,3065 2574.5,3307.19 2644.5,3307.19 2714.5,3307.19 2784.5,3307.19 2974.5,3307.19 3044.5,3307.19 3114.5,3307.19 3184.5,3307.19 1775,3308 1845,3308 1915,3308 1985,3308 2168.5,3307.61 2238.5,3307.61 2308.5,3307.61 2378.5,3307.61 2574.5,3372.19 2644.5,3372.19 2714.5,3372.19 2784.5,3372.19 2974.5,3372.19 3044.5,3372.19 3114.5,3372.19 3184.5,3372.19 1775,3373 1845,3373 1915,3373 1985,3373 2168.5,3372.61 2238.5,3372.61 2308.5,3372.61 2378.5,3372.61 2574.5,3437.19 2644.5,3437.19 2714.5,3437.19 2784.5,3437.19 2974.5,3437.19 3044.5,3437.19 3114.5,3437.19 3184.5,3437.19 1775,3438 1845,3438 1915,3438 1985,3438 2168.5,3437.61 2238.5,3437.61 2308.5,3437.61 2378.5,3437.61 2574.5,3502.19 2644.5,3502.19 2714.5,3502.19 2784.5,3502.19 2974.5,3502.19 3044.5,3502.19 3114.5,3502.19 3184.5,3502.19 1775,3503 1845,3503 1915,3503 1985,3503 2168.5,3502.61 2238.5,3502.61 2308.5,3502.61 2378.5,3502.61 2574.5,3567.19 2644.5,3567.19 2714.5,3567.19 2784.5,3567.19 2974.5,3567.19 3044.5,3567.19 3114.5,3567.19 3184.5,3567.19 1775,3568 1845,3568 1915,3568 1985,3568 2168.5,3567.61 2238.5,3567.61 2308.5,3567.61 2378.5,3567.61 2574.5,3637.19 2644.5,3637.19 2714.5,3637.19 2784.5,3637.19 2974.5,3637.19 3044.5,3637.19 3114.5,3637.19 3184.5,3637.19 1775,3638 1845,3638 1915,3638 1985,3638 2168.5,3637.61 2238.5,3637.61 2308.5,3637.61 2378.5,3637.61 1172,3958 1509,3962 1182,4109 1517,4109
  other v2: 5095,60 5155,60 5215,60 5095,120 5155,120 5215,120 5095,181 5155,181 5215,181 5095,241 5155,241 5215,241 4825,3080 4885,3080 4945,3080 5005,3080 5065,3080 5125,3080 5185,3080 5245,3080 5305,3080 5365,3080 5425,3080 4825,3141 4885,3141 4945,3141 5005,3141 5065,3141 5125,3141 5185,3141 5245,3141 5305,3141 5365,3141 5425,3141 4825,3201 4885,3201 4945,3201 5005,3201 5065,3201 5125,3201 5185,3201 5245,3201 5305,3201 5365,3201 5425,3201 4385,3690 4445,3690 4505,3690 4565,3690 4625,3690 4685,3690 4745,3690 4805,3690 4865,3690 4925,3690 4205,3750 4265,3750 4325,3750 4385,3750 4445,3750 4505,3750 4565,3750 4625,3750 4685,3750 4745,3750 4805,3750 4865,3750 4925,3750 4205,3811 4265,3811 4325,3811 4385,3811 4445,3811 4505,3811 4565,3811 4625,3811 4685,3811 4745,3811 4805,3811 4865,3811 4925,3811 4205,3871 4265,3871 4325,3871 4385,3871 4445,3871 4505,3871 4565,3871 4625,3871 4685,3871 4745,3871 4805,3871 4865,3871 4925,3871
  other v3: 593.39,786.69 636.69,786.69 680,786.69 723.31,786.69 766.61,786.69 1468.39,786.69 1511.69,786.69 1555,786.69 1598.31,786.69 1641.61,786.69 2343.39,786.69 2386.69,786.69 2430,786.69 2473.31,786.69 2516.61,786.69 3218.39,786.69 3261.69,786.69 3305,786.69 3348.31,786.69 3391.61,786.69 4093.39,786.69 4136.69,786.69 4180,786.69 4223.31,786.69 4266.61,786.69 593.39,830 636.69,830 680,830 723.31,830 766.61,830 1468.39,830 1511.69,830 1555,830 1598.31,830 1641.61,830 2343.39,830 2386.69,830 2430,830 2473.31,830 2516.61,830 3218.39,830 3261.69,830 3305,830 3348.31,830 3391.61,830 4093.39,830 4136.69,830 4180,830 4223.31,830 4266.61,830 593.39,873.31 636.69,873.31 680,873.31 723.31,873.31 766.61,873.31 1468.39,873.31 1511.69,873.31 1555,873.31 1598.31,873.31 1641.61,873.31 2343.39,873.31 2386.69,873.31 2430,873.31 2473.31,873.31 2516.61,873.31 3218.39,873.31 3261.69,873.31 3305,873.31 3348.31,873.31 3391.61,873.31 4093.39,873.31 4136.69,873.31 4180,873.31 4223.31,873.31 4266.61,873.31
  other v5: 5238,1511 5303,1511
  other v6: 5045.2,1399.94 5084.57,1399.94 5123.94,1399.94 5045.2,1439.31 5084.57,1439.31 5123.94,1439.31 5045.2,1478.68 5084.57,1478.68 5123.94,1478.68
GPIO0_EXP: EXP0.7 U3.140 | length 3595.4
  Top Layer w8: U3.140@1905.35,2520.75 2144.25,2520.75 2270,2395 2366.41,2395 2383.41,2378 2905.39,2378 2949.31,2421.93 3251.86,2421.93 3270.78,2403 3394.61,2403 3524.61,2273 4473.2,2273 4876.2,2676 5076,2676 EXP0.7@5160,2760
GPIO1_EXP: EXP0.8 U3.139 | length 3648.8
  Top Layer w8: U3.139@1905.35,2501.06 2143.94,2501.06 2264,2381 2360.61,2381 2377.61,2364 2911.18,2364 2955.11,2407.93 3246.06,2407.93 3264.98,2389 3388.82,2389 3518.82,2259 4479,2259 4882,2662 5112,2662 EXP0.8@5210,2760
GPIO2_EXP: EXP0.14 U3.21 | length 4489.6
  Top Layer w8: U3.21@1440.79,2670.35 1440.79,2790.79 1596,2946 2033.2,2946 2447.2,2532 2841.6,2532 2886.6,2577 3166.8,2577 3197.3,2607.5 3337.91,2607.5 3374.41,2571 3464.2,2571 3594.2,2441 4403.41,2441 4748,2785.59 4748,2886.59 4819.41,2958 5062,2958 EXP0.14@5160,2860
GPIO3_EXP: EXP0.13 U3.22 | length 4571
  Top Layer w8: U3.22@1421.1,2670.35 1421.1,2791.1 1590,2960 2038.99,2960 2452.99,2546 2835.8,2546 2880.8,2591 3161,2591 3191.5,2621.5 3343.71,2621.5 3380.21,2585 3470,2585 3600,2455 4397.61,2455 4734,2791.39 4734,2892.39 4813.61,2972 5098,2972 EXP0.13@5210,2860
I2C_SCL: EXP0.3 U3.70 | length 5028.9
  Top Layer w8: U3.70@1074.65,1949.88 1114.88,1949.88 1145,1980 1200,1980 1222.5,2002.5 1222.5,2092.5 v2(1245,2115) ; v2(1900,1865) 1965,1865 1990,1840 v2(2195,1840) ; v2(2285,2455) 2303,2437 2383.8,2437 2400.8,2420 2887.99,2420 2931.92,2463.93 3269.25,2463.93 3288.18,2445 3412.01,2445 3542.01,2315 4455.6,2315 4858.6,2718 4918,2718 EXP0.3@4960,2760
  Bottom Layer w8: v2(1245,2115) 1260,2100 1699.71,2100 1831.96,1967.75 1831.96,1933.04 v2(1900,1865) ; v2(2195,1840) 2240.2,1840 2310,1909.8 2310,2430 v2(2285,2455)
I2C_SDA: EXP0.18 U3.9 | length 3882.1
  Top Layer w8: U3.9@1677.01,2670.35 1677.01,2712.01 1725,2760 1735,2760 v2(1770,2795) ; v2(2065,2795) 2085,2775 2125,2775 2424,2476 2864.79,2476 2909.79,2521 3189.99,2521 3220.49,2551.5 3314.72,2551.5 3351.22,2515 3441.01,2515 3571.01,2385 4426.61,2385 4804,2762.39 4804,2863.4 4842.6,2902 4918,2902 EXP0.18@4960,2860
  Bottom Layer w8: v2(1770,2795) v2(2065,2795)
INPUT_GND: C58.1 C59.1 DA4.3 U6.2 U6.8 USB.4 USB.P$1 USB.P$2 | length 337.2
  Top Layer w22: U6.8@515,3610.12 v1(515,3685) ; DA4.3@590,3837.6 v1(590,3910) ; U6.2@815,3610.12 v1(815,3800)
KRESET: EXP0.5
MAX_ES1: C2_EndstopChannel1.1 DA1.2 MAX1_EndstopChannel1.1 R3_EndstopChannel1.2 U3.76 | length 4167.8
  Top Layer w8: v2(1140,1670) 1140,1701.82 1204.57,1766.39 U3.76@1204.57,1839.65 ; MAX1_EndstopChannel1.1@3430,1745 3385,1790 3385,2070 3400.94,2085.95 R3_EndstopChannel1.2@3400.94,2175 3402.44,2176.5 C2_EndstopChannel1.1@3402.44,2225 3350,2172.56 3350,1650 3390,1610 3465,1610 3492.6,1582.4 DA1.2@3492.6,1552.4 v2(3492.6,1465)
  Bottom Layer w8: v2(1140,1670) 1210,1600 1655,1600 1740,1515 2223.79,1515 2396.79,1688 3173.01,1688 3366.01,1495 3462.6,1495 v2(3492.6,1465)
MAX_ES2: C2_EndstopChannel2.1 DA2.2 MAX1_EndstopChannel2.1 R3_EndstopChannel2.2 U3.95 | length 4518.6
  Top Layer w8: U3.95@1578.58,1839.65 1578.58,1761.42 1585,1755 v2(1585,1735) ; C2_EndstopChannel2.1@4242.44,2225 C2_EndstopChannel2.1@4240.94,2223.5 ; MAX1_EndstopChannel2.1@4270,1745 4225,1790 4225,2070 4240.94,2085.95 R3_EndstopChannel2.2@4240.94,2175 C2_EndstopChannel2.1@4240.94,2223.5 ; v2(4332.6,1460) DA2.2@4332.6,1552.4 4332.6,1602.4 4305,1630 4225,1630 4200,1655 4200,2182.56 C2_EndstopChannel2.1@4240.94,2223.5
  Bottom Layer w8: v2(1585,1735) 1585,1700 1615,1670 1664.2,1670 1760.64,1573.56 2203.16,1573.56 2373.6,1744 3196.2,1744 3389.2,1551 4241.6,1551 v2(4332.6,1460)
MAX_ES3: C2_EndstopChannel3.1 DA3.2 MAX1_EndstopChannel3.1 R3_EndstopChannel3.2 U3.78 | length 4520.1
  Top Layer w8: v2(1200,1670) 1200,1704 1243.94,1747.94 U3.78@1243.94,1839.65 ; MAX1_EndstopChannel3.1@3850,1745 3805,1790 3805,2070 3820.94,2085.95 R3_EndstopChannel3.2@3820.94,2175 3820.94,2223.5 C2_EndstopChannel3.1@3822.44,2225 3790,2225 3765,2200 3765,1710 3820,1655 3865,1655 3910,1610 DA3.2@3910,1552.4 ; v2(3910,1465) 3910,1549.8 DA3.2@3912.6,1552.4
  Bottom Layer w8: v2(1200,1670) 1242,1628 1666.6,1628 1749.04,1545.56 2214.75,1545.56 2385.2,1716 3184.6,1716 3377.6,1523 3852,1523 v2(3910,1465)
MCCDZ: R28.1 SD.3 U3.72 | length 2255
  Top Layer w8: R28.1@214.53,2280 287,2352.47 287,2552.4 137,2702.4 137,2763.72 183.9,2810.63 SD.3@200,2810.63 400.79,2810.63 450.32,2761.1 450.32,2164.89 704.69,1910.51 U3.72@1074.65,1910.51
MCCK: R27.1 SD.5 U3.71 | length 2335
  Top Layer w8: R27.1@214.53,2330 273,2388.47 273,2546.6 123,2696.6 123,2863 157.24,2897.24 SD.5@200,2897.24 333.97,2897.24 465,2766.22 465,2170 704.8,1930.2 U3.71@1074.65,1930.2
MCDZ0: R26.1 SD.7 U3.107 | length 3780.6
  Top Layer w8: R26.1@214.53,2380 259,2424.47 259,2540.8 109,2690.8 109,2934.2 158.66,2983.86 SD.7@200,2983.86 203.86,2980 v2(255,2980) ; v2(345,2760) 390,2715 390,2144.52 1064.52,1470 v2(1185,1470) ; v2(1765,1470) 1865,1570 1865,1725 1814.8,1775.2 U3.107@1814.8,1839.65
  Bottom Layer w8: v2(255,2980) 255,2850 v2(345,2760) ; v2(1185,1470) v2(1765,1470)
MCDZ1: R24.1 SD.8 U3.81 | length 3070.4
  Top Layer w8: R24.1@214.53,2430 245,2460.47 245,2535 95,2685 95,2940 182.17,3027.17 SD.8@200,3027.17 202.83,3030 v2(255,3030) ; v2(380,2760) 405,2735 405,2149.32 979.32,1575 1180,1575 1302.99,1697.99 U3.81@1302.99,1839.65
  Bottom Layer w8: v2(255,3030) 280,3005 280,2970 270,2960 270,2855 342.5,2782.5 357.5,2782.5 v2(380,2760)
MCDZ2: R34.1 SD.1 U3.80 | length 2776.3
  Top Layer w8: R34.1@214.53,2180 320,2285.47 320,2560 200,2680 SD.1@200,2724 234,2724 292.63,2782.63 389.19,2782.63 421,2750.82 421,2153.12 985.12,1589 1174.2,1589 1283.31,1698.11 U3.80@1283.31,1839.65
MCDZ3: R29.1 SD.2 U3.79 | length 2779.2
  Top Layer w8: R29.1@214.53,2230 305,2320.47 305,2554.2 151,2708.2 151,2751 167.31,2767.31 SD.2@200,2767.31 257.31,2767.31 286.63,2796.63 394.99,2796.63 435,2756.62 435,2158.92 990.92,1603 1168.4,1603 1263.62,1698.22 U3.79@1263.62,1839.65
MIN_ES1: C1_EndstopChannel1.1 DA1.1 MIN1_EndstopChannel1.1 R2_EndstopChannel1.2 U3.77 | length 3940.5
  Top Layer w8: v2(1170,1700) 1224.25,1754.25 U3.77@1224.25,1839.65 ; v2(3570,1465) DA1.1@3570,1549.8 ; DA1.1@3570,1552.4 3570,1585 3595,1610 3665,1610 3700,1645 3700,2183.03 C1_EndstopChannel1.1@3658.03,2225 3658.03,2176.97 3630,2148.94 MIN1_EndstopChannel1.1@3630,1985
  Bottom Layer w8: v2(1170,1700) 1170,1668.18 1224.18,1614 1660.8,1614 1743.24,1531.56 2220.55,1531.56 2390.99,1702 3178.8,1702 3371.8,1509 3526,1509 v2(3570,1465)
MIN_ES2: C1_EndstopChannel2.1 DA2.1 MIN1_EndstopChannel2.1 R2_EndstopChannel2.2 U3.100 | length 4247
  Top Layer w8: U3.100@1677.01,1839.65 1677.01,1792.99 v2(1690,1780) ; v2(4407.4,1460) DA2.1@4407.4,1552.4 4407.4,1592.4 4425,1610 4500,1610 4545,1655 4545,2178.03 C1_EndstopChannel2.1@4498.03,2225 4498.03,2176.97 4470,2148.94 MIN1_EndstopChannel2.1@4470,1985
  Bottom Layer w8: 1700,1770 1700,1653.99 1766.44,1587.56 2197.36,1587.56 2367.8,1758 3202,1758 3395,1565 4302.4,1565 v2(4407.4,1460)
MIN_ES3: C1_EndstopChannel3.1 DA3.1 MIN1_EndstopChannel3.1 R2_EndstopChannel3.2 U3.88 | length 4088.4
  Top Layer w8: v2(1425,1740) 1440.79,1755.79 U3.88@1440.79,1839.65 ; v2(3990,1465) 3990,1600 4050,1660 4085,1660 4140,1715 4140,2195 4110,2225 C1_EndstopChannel3.1@4078.03,2225 4078.03,2176.97 4050,2148.94 MIN1_EndstopChannel3.1@4050,1985
  Bottom Layer w8: v2(1425,1740) 1425,1700 1483,1642 1672.4,1642 1754.84,1559.56 2208.96,1559.56 2379.4,1730 3190.4,1730 3383.4,1537 3918,1537 v2(3990,1465)
MISO: EXP0.19 TP7.1 U3.108 U4_ThermocoupleChannel1.7 U4_ThermocoupleChannel2.7 | length 5077.5
  Top Layer w8: U3.108@1834.49,1839.65 1965.35,1839.65 1985,1820 2165,1820 v2(2185,1800) ; v2(2370,2490) 2390.2,2490 2418.2,2462 2870.59,2462 2915.59,2507 3212,2507 3242.5,2537.5 3308.92,2537.5 3335.5,2510.92 3335.5,2510.71 3345.21,2501 3435.21,2501 3565.21,2371 4432.41,2371 4818,2756.59 4818,2857.6 4848.4,2888 4882,2888 EXP0.19@4910,2860 ; v2(3440,2660) 3545,2660 3610,2725 U4_ThermocoupleChannel1.7@3610,2769.49 v2(3610,2840) ; v2(3610,3080) U4_ThermocoupleChannel2.7@3610,3154.49
  Bottom Layer w8: v2(2185,1800) 2197.5,1787.5 2239.32,1787.5 2339,1887.18 2339,2457.18 2370,2488.18 v2(2370,2490) ; v2(3225,2520) 3225,2574 3311,2660 v2(3440,2660) ; v2(3610,2840) 3600,2840 3585,2855 3585,3055 v2(3610,3080)
MOD0E1: TP37_DriverChannelDRV88251.1 U3.84 U7_DriverChannelDRV88251.24 | length 1432
  Top Layer w8: U7_DriverChannelDRV88251.24@616.02,942.2 616.02,991.02 645,1020 TP37_DriverChannelDRV88251.1@645,1155 645,1229.2 792.8,1377 1177.8,1377 1350.68,1549.87 1350.68,1780.07 1362.05,1791.44 U3.84@1362.05,1839.65
MOD0E2: TP37_DriverChannelDRV88252.1 U3.91 U7_DriverChannelDRV88252.24 | length 917.8
  Top Layer w8: U7_DriverChannelDRV88252.24@1491.02,942.2 1491.02,991.02 1520,1020 TP37_DriverChannelDRV88252.1@1520,1155 1520,1195 1499.84,1215.16 U3.91@1499.84,1839.65
MOD0E3: TP37_DriverChannelDRV88253.1 U3.98 U7_DriverChannelDRV88253.24 | length 1540.2
  Top Layer w8: U3.98@1637.64,1839.65 1637.64,1792.36 1643,1787 1643,1471.6 1750.6,1364 2291.8,1364 2395,1260.8 TP37_DriverChannelDRV88253.1@2395,1155 2395,1020 2366.02,991.02 U7_DriverChannelDRV88253.24@2366.02,942.2
MOD0E4: TP37_DriverChannelDRV88254.1 U3.113 U7_DriverChannelDRV88254.24 | length 2031.4
  Top Layer w8: U3.113@1905.35,1989.25 2277.56,1989.25 2782.81,1484 3105.6,1484 3270,1319.6 TP37_DriverChannelDRV88254.1@3270,1155 3270,1020 3241.02,991.02 U7_DriverChannelDRV88254.24@3241.02,942.2
MOD0E5: TP37_DriverChannelDRV88255.1 U3.120 U7_DriverChannelDRV88255.24 | length 2934.9
  Top Layer w8: U3.120@1905.35,2127.05 1982.95,2127.05 1986,2124 2010.8,2124 2058.92,2075.88 2309.72,2075.88 2817.6,1568 3142.6,1568 3347.6,1363 4052.8,1363 4145,1270.8 TP37_DriverChannelDRV88255.1@4145,1155 4145,1020 4116.02,991.02 U7_DriverChannelDRV88255.24@4116.02,942.2
MOD1E1: TP36_DriverChannelDRV88251.1 U3.83 U7_DriverChannelDRV88251.25 | length 1434.4
  Top Layer w8: U7_DriverChannelDRV88251.25@590.43,942.2 590.43,990.43 610,1010 TP36_DriverChannelDRV88251.1@610,1090 610,1213.99 787.01,1391 1172.01,1391 1336.68,1555.67 1336.68,1785.87 1342.36,1791.56 U3.83@1342.36,1839.65
MOD1E2: TP36_DriverChannelDRV88252.1 U3.90 U7_DriverChannelDRV88252.25 | length 907.7
  Top Layer w8: U7_DriverChannelDRV88252.25@1465.43,942.2 1465.43,990.43 1485,1010 TP36_DriverChannelDRV88252.1@1485,1090 1485,1169.5 1480,1174.5 1480,1839.49 U3.90@1480.16,1839.65
MOD1E3: TP36_DriverChannelDRV88253.1 U3.97 U7_DriverChannelDRV88253.25 | length 1529.9
  Top Layer w8: U3.97@1617.95,1839.65 1617.95,1792.25 1629,1781.2 1629,1465.8 1744.8,1350 2286.01,1350 2360,1276.01 TP36_DriverChannelDRV88253.1@2360,1090 2360,1010 2340.43,990.43 U7_DriverChannelDRV88253.25@2340.43,942.2
MOD1E4: TP36_DriverChannelDRV88254.1 U3.117 U7_DriverChannelDRV88254.25 | length 2097.5
  Top Layer w8: U3.117@1905.35,2067.99 1982.01,2067.99 v2(1995,2055) ; v2(2015,1955) 2055,1955 2075,1975 2272.01,1975 2777.01,1470 3099.8,1470 3235,1334.8 TP36_DriverChannelDRV88254.1@3235,1090 3235,1010 3215.43,990.43 U7_DriverChannelDRV88254.25@3215.43,942.2
  Bottom Layer w8: v2(1995,2055) 1995,1975 v2(2015,1955)
MOD1E5: TP36_DriverChannelDRV88255.1 U3.119 U7_DriverChannelDRV88255.25 | length 2898.4
  Top Layer w8: U3.119@1905.35,2107.36 1907.99,2110 2005,2110 2053.12,2061.88 2303.92,2061.88 2811.8,1554 3136.8,1554 3341.8,1349 4046,1349 4110,1285 TP36_DriverChannelDRV88255.1@4110,1090 4110,1010 4090.43,990.43 U7_DriverChannelDRV88255.25@4090.43,942.2
MOD2E1: TP35_DriverChannelDRV88251.1 U3.82 U7_DriverChannelDRV88251.26 | length 1436.9
  Top Layer w8: U7_DriverChannelDRV88251.26@564.84,942.2 564.84,994.84 575,1005 TP35_DriverChannelDRV88251.1@575,1155 575,1198.79 781.21,1405 1166.21,1405 1322.68,1561.47 U3.82@1322.68,1839.65
MOD2E2: TP35_DriverChannelDRV88252.1 U3.89 U7_DriverChannelDRV88252.26 | length 906
  Top Layer w8: U7_DriverChannelDRV88252.26@1439.84,942.2 1439.84,994.84 1450,1005 TP35_DriverChannelDRV88252.1@1450,1155 1450,1205 1460.47,1215.47 U3.89@1460.47,1839.65
MOD2E3: TP35_DriverChannelDRV88253.1 U3.96 U7_DriverChannelDRV88253.26 | length 1519.7
  Top Layer w8: U3.96@1598.27,1839.65 1598.27,1786.73 1615,1770 1615,1460 1739,1336 2280.21,1336 2325,1291.21 TP35_DriverChannelDRV88253.1@2325,1155 2325,1005 2314.84,994.84 U7_DriverChannelDRV88253.26@2314.84,942.2
MOD2E4: TP35_DriverChannelDRV88254.1 U3.143 U7_DriverChannelDRV88254.26 | length 2545
  Top Layer w8: U3.143@1905.35,2579.8 1954.8,2579.8 1960,2585 v2(1990,2585) ; v2(2085,1950) 2130,1950 2140,1960 2267.21,1960 2771.21,1456 3094,1456 3200,1350 TP35_DriverChannelDRV88254.1@3200,1155 3200,1005 3189.84,994.84 U7_DriverChannelDRV88254.26@3189.84,942.2
  Bottom Layer w8: v2(1990,2585) 2035,2540 2035,2000 v2(2085,1950)
MOD2E5: TP35_DriverChannelDRV88255.1 U3.118 U7_DriverChannelDRV88255.26 | length 2858
  Top Layer w8: U3.118@1905.35,2087.68 2002.32,2087.68 2042.12,2047.88 2298.12,2047.88 2806.01,1540 3131.01,1540 3336.01,1335 4040.2,1335 4075,1300.2 TP35_DriverChannelDRV88255.1@4075,1155 4075,1005 4064.84,994.84 U7_DriverChannelDRV88255.26@4064.84,942.2
MODE0_EXP1: EXP1.1 U3.24 | length 2298.8
  Top Layer w8: EXP1.1@185,1480 325,1340 696.41,1340 800,1443.59 800,1668 v2(810,1678) ; v2(1335,2005) 1381.73,2051.73 U3.24@1381.73,2670.35
  Bottom Layer w8: v2@810,1680 843.61,1680 1093.61,1930 1221.61,1930 1263.61,1972 1302,1972 v2(1335,2005)
MODE0_EXP2: EXP1.20 U3.27 | length 1933.6
  Top Layer w8: v2(1255,2035) 1280,2060 1280,2070 1322.68,2112.68 U3.27@1322.68,2670.35
  Bottom Layer w8: EXP1.20@185,1580 292.44,1687.44 647.84,1687.44 783.4,1823 927.21,1823 1076.21,1972 1204.21,1972 1246.21,2014 1254,2014 1255,2015 v2(1255,2035)
MODE1_EXP1: EXP1.2 U3.23 | length 2243.7
  Top Layer w8: EXP1.2@235,1480 360,1355 691.61,1355 775,1438.39 v2(775,1615) ; v2(1340,1965) 1401.42,2026.42 U3.23@1401.42,2670.35
  Bottom Layer w8: v2(775,1615) 790,1630 813.41,1630 1099.41,1916 1227.41,1916 1269.41,1958 1308,1958 1315,1965 v2(1340,1965)
MODE1_EXP2: EXP1.19 U3.26 | length 1903.4
  Top Layer w8: v2(1290,2035) 1342.36,2087.36 U3.26@1342.36,2670.35
  Bottom Layer w8: EXP1.19@235,1580 245.4,1580 334.4,1669 649.2,1669 789.2,1809 933.01,1809 1082.01,1958 1210.01,1958 1252.01,2000 1260,2000 1290,2030 v2(1290,2035)
MODE2_EXP1: EXP1.3 U3.16 | length 2082
  Top Layer w8: v2(1380,1965) 1405.2,1965 1539.21,2099.01 U3.16@1539.21,2670.35
  Bottom Layer w8: EXP1.3@285,1480 355,1550 753.21,1550 1105.21,1902 1233.21,1902 1271.21,1940 1355,1940 v2(1380,1965)
MODE2_EXP2: EXP1.18 U3.25 | length 1885
  Top Layer w8: v2(1295,2000) 1362.05,2067.05 U3.25@1362.05,2670.35
  Bottom Layer w8: EXP1.18@285,1580 285,1585 355,1655 655,1655 795,1795 938.81,1795 1087.81,1944 1215.81,1944 1257.81,1986 1281,1986 v2(1295,2000)
MOSI: EXP0.20 TP8.1 U3.109 | length 4061.1
  Top Layer w8: U3.109@1905.35,1910.51 1954.69,1910.51 1997.2,1868 2198.82,1868 2230,1836.82 v2(2230,1810) ; v2(2330,2480) 2345,2465 2395.4,2465 2412.4,2448 2876.39,2448 2920.32,2491.93 3232.34,2491.93 3255.41,2515 v2(3270,2515) 3311.62,2515 3321.5,2505.12 3321.5,2504.91 3339.41,2487 3429.41,2487 3559.41,2357 4438.21,2357 4832,2750.79 4832,2832 EXP0.20@4860,2860 EXP0.20@4860,2857
  Bottom Layer w8: v2(2230,1810) 2325,1905 2325,2480 v2(2330,2480) ; TP8.1@3225,2470 v2(3270,2515) v2@3266,2519
NetC4_2: C4.2 F4.1 U2.1 | length 225.8
  Top Layer w40: U2.1@5057.17,2172.45 5057.17,2134.83 5090.15,2101.85 C4.2@5090.15,2061 5113,2061 5149,2097 F4.1@5175.94,2097
NetC22_1: C22.1 U1.4 | length 112
  Top Layer w8: U1.4@5104.26,1344.83 5104.26,1322.97 5114.71,1312.52 5169.22,1312.52 C22.1@5184,1327.3
NetC40_1: C40.1 U1.10 | length 93.4
  Top Layer w12: C40.1@5039.23,1624.77 5045.2,1618.8 U1.10@5045.2,1533.8
NetC40_2: C40.2 D2.C L1.1 U1.9 | length 475.6
  Top Layer w12: U1.9@5064.89,1533.8 5064.89,1615.12 5092.77,1643 5141.74,1691.97 5141.74,1811 5191.26,1811 D2.C@5274,1893.74
NetC43_2: C43.2 U3.36 X2.1 | length 416.3
  Top Layer w8: X2.1@965,2965 965,2830 1015,2780 1095,2780 1145.51,2729.49 U3.36@1145.51,2670.35
NetC44_2: C44.2 U3.35 X2.2 | length 315.6
  Top Layer w8: X2.2@1114.61,2965 1117.56,2962.05 C44.2@1117.56,2855 1117.56,2797.44 1165.2,2749.8 U3.35@1165.2,2670.35
NetC56_2: C56.2 U6.12 U6.14 | length 373.4
  Top Layer w12: U6.12@665,3249.88 665,3310 690,3335 740,3335 765,3310 U6.14@765,3249.88
  Top Layer w22: C56.2@765,3117.44 U6.14@765,3249.88
NetC58_2: C58.2 U6.1 USB.1 | length 599.8
  Top Layer w10: U6.1@865,3610.12 865,3665 872.56,3672.56 C58.2@872.56,3695 ; C58.2@870,3697.56 v1(870,3775)
  Bottom Layer w10: USB.1@575,4069 814,3830 845,3830 870,3805 v1(870,3775)
NetC59_2: C59.2 U6.3 U6.4 U6.5 | length 238
  Top Layer w20: U6.5@665,3610.12 U6.4@715,3610.12 U6.3@765,3610.12 765,3700 757.44,3707.56 C59.2@757.44,3745
NetC66_DriverChannelDRV88251_2: C66_DriverChannelDRV88251.2 R30_DriverChannelDRV88251.2 U7_DriverChannelDRV88251.3 | length 216.1
  Top Layer w8: R30_DriverChannelDRV88251.2@410,609.53 484.53,609.53 564.84,689.84 U7_DriverChannelDRV88251.3@564.84,717.8
NetC66_DriverChannelDRV88252_2: C66_DriverChannelDRV88252.2 R30_DriverChannelDRV88252.2 U7_DriverChannelDRV88252.3 | length 216.1
  Top Layer w8: R30_DriverChannelDRV88252.2@1285,609.53 1359.53,609.53 1439.84,689.84 U7_DriverChannelDRV88252.3@1439.84,717.8
NetC66_DriverChannelDRV88253_2: C66_DriverChannelDRV88253.2 R30_DriverChannelDRV88253.2 U7_DriverChannelDRV88253.3 | length 216.1
  Top Layer w8: R30_DriverChannelDRV88253.2@2160,609.53 2234.53,609.53 2314.84,689.84 U7_DriverChannelDRV88253.3@2314.84,717.8
NetC66_DriverChannelDRV88254_2: C66_DriverChannelDRV88254.2 R30_DriverChannelDRV88254.2 U7_DriverChannelDRV88254.3 | length 216.1
  Top Layer w8: R30_DriverChannelDRV88254.2@3035,609.53 3109.53,609.53 3189.84,689.84 U7_DriverChannelDRV88254.3@3189.84,717.8
NetC66_DriverChannelDRV88255_2: C66_DriverChannelDRV88255.2 R30_DriverChannelDRV88255.2 U7_DriverChannelDRV88255.3 | length 216.1
  Top Layer w8: R30_DriverChannelDRV88255.2@3910,609.53 3984.53,609.53 4064.84,689.84 U7_DriverChannelDRV88255.3@4064.84,717.8
NetC68_DriverChannelDRV88251_1: C68_DriverChannelDRV88251.1 U7_DriverChannelDRV88251.1 | length 256.6
  Top Layer w8: C68_DriverChannelDRV88251.1@350,607.56 340,617.56 340,630 360,650 480,650 513.66,683.66 U7_DriverChannelDRV88251.1@513.66,717.8
NetC68_DriverChannelDRV88251_2: C68_DriverChannelDRV88251.2 U7_DriverChannelDRV88251.2 | length 302.3
  Top Layer w8: C68_DriverChannelDRV88251.2@350,552.44 370,572.44 370,620 386,636 486,636 539.25,689.25 U7_DriverChannelDRV88251.2@539.25,717.8
NetC68_DriverChannelDRV88252_1: C68_DriverChannelDRV88252.1 U7_DriverChannelDRV88252.1 | length 256.6
  Top Layer w8: C68_DriverChannelDRV88252.1@1225,607.56 1215,617.56 1215,630 1235,650 1355,650 1388.66,683.66 U7_DriverChannelDRV88252.1@1388.66,717.8
NetC68_DriverChannelDRV88252_2: C68_DriverChannelDRV88252.2 U7_DriverChannelDRV88252.2 | length 302.3
  Top Layer w8: C68_DriverChannelDRV88252.2@1225,552.44 1245,572.44 1245,620 1261,636 1361,636 1414.25,689.25 U7_DriverChannelDRV88252.2@1414.25,717.8
NetC68_DriverChannelDRV88253_1: C68_DriverChannelDRV88253.1 U7_DriverChannelDRV88253.1 | length 256.6
  Top Layer w8: C68_DriverChannelDRV88253.1@2100,607.56 2090,617.56 2090,630 2110,650 2230,650 2263.66,683.66 U7_DriverChannelDRV88253.1@2263.66,717.8